# Altium PCB PCB1.PcbDoc (part 6 of 12)
Units mm, origin at the board's own origin, x right, y up, seen from the top; angles counter-clockwise.
Board outline 100 x 100 mm, 6 copper layers (Top Layer, Int1 (GND), Int2 (Sign), Int3 (Sign), Int4 (PWR), Bottom Layer), stack 1.538 mm thick; 614 components, 712 nets, 3014 pads, 1096 vias.
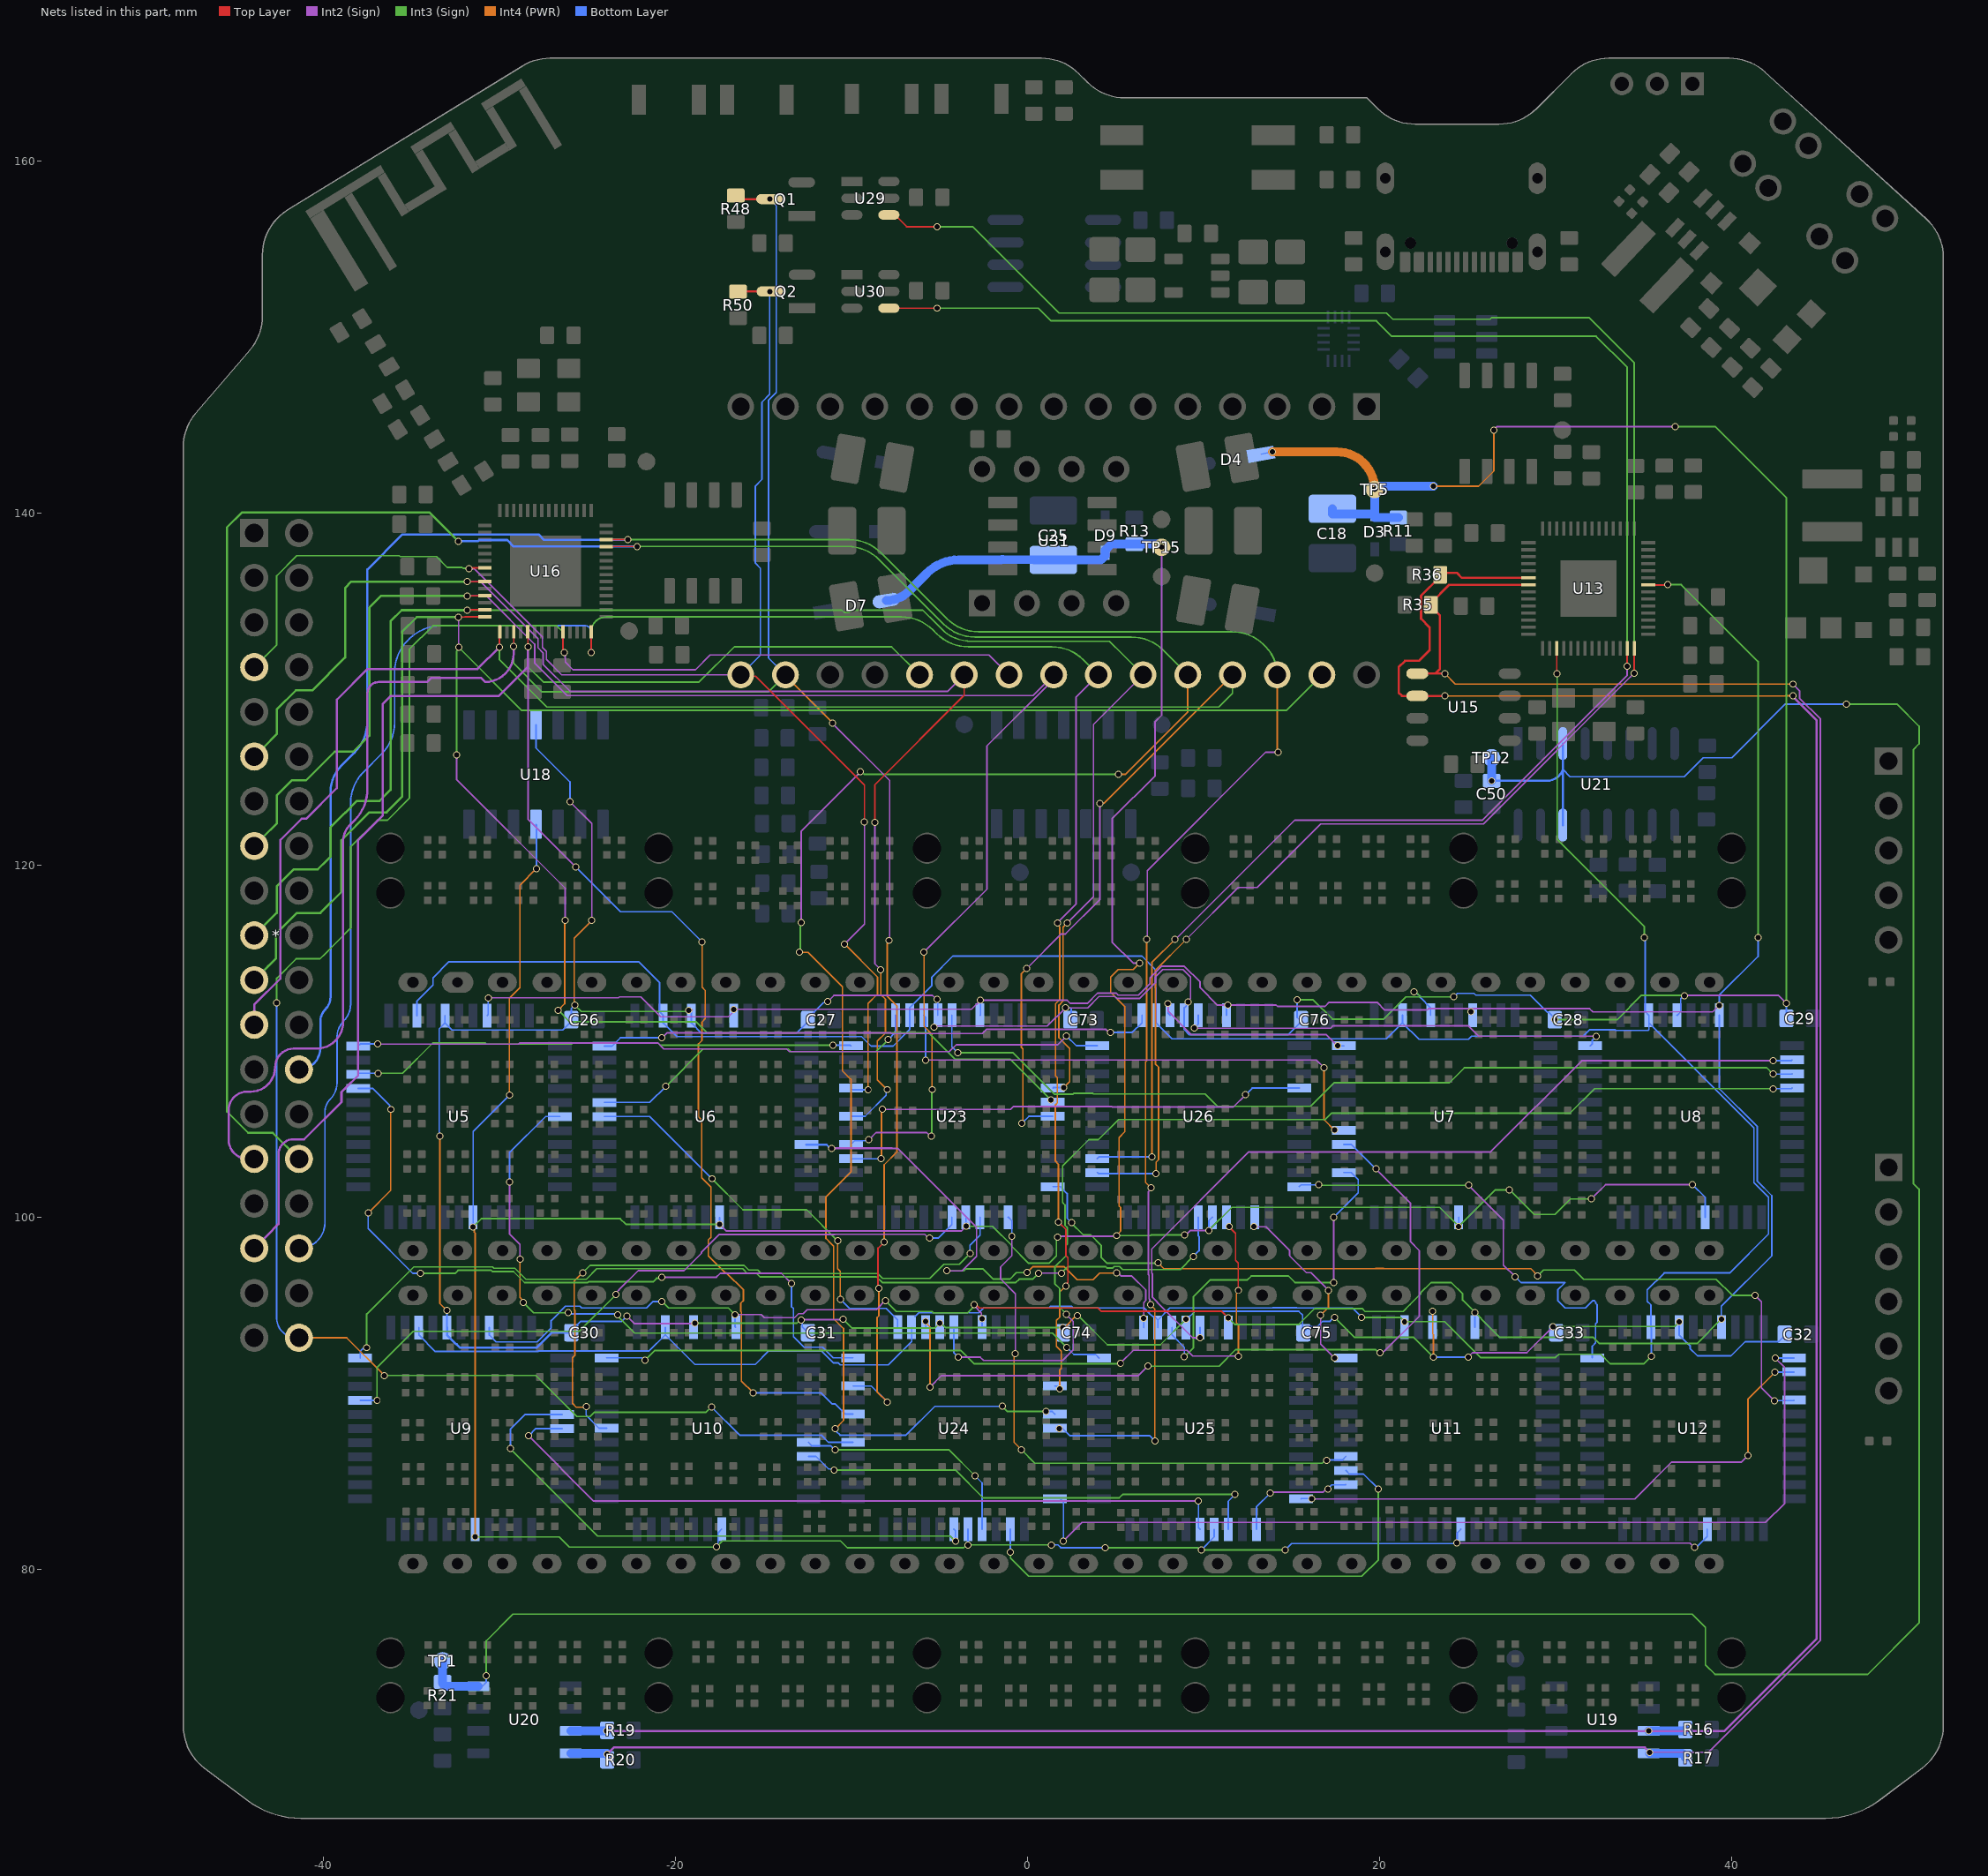
[diagram p9: the nets of this part, all layers, seen from the top]

## Via types
v1: diameter 0.4, hole 0.3, Top Layer to Bottom Layer, tented both sides, 1087 vias
v2: diameter 0.4, hole 0.3, Top Layer to Bottom Layer, 6 vias
v3: diameter 0.4, hole 0.3, Top Layer to Bottom Layer, tented top, 2 vias
v4: diameter 0.6, hole 0.5, Top Layer to Bottom Layer, 1 vias

## Nets (pads, with @x,y where several pads share a name; then routed paths per layer and width w, separated by ;. In a path a pad name is that pad's centre, name@x,y a point inside that pad or via, vN(x,y) a via of type N, cw(c..) or ccw(c..) an arc to the next point about the centre after c; other vN are vias at no path point) (continued)
CH446_DATA: U5.36 U6.36 U7.36 U8.36 U9.36 U10.36 U11.36 U12.36 U13.17 U23.36 U24.36 U25.36 U26.36 | length 211.3
  Top Layer w0.09: U13.17@30.057,132.331 30.057,130.914 v1(30.074,130.897)
  Int3 (Sign) w0.09: v1(18.971,94.32) 21.162,94.32 v1(21.405,94.077) 23.69,94.077 25.724,92.043 29.984,92.043 30.169,92.227 32.55,92.227 33.097,91.68 34.996,91.68 v1(35.432,92.115) ; v1(30.074,130.897) v1(30.074,130.897) 30.075,121.485 35.025,116.535 v1(35.025,115.89)
  Bottom Layer w0.09: U5.36@-34.713,111.468 -34.713,112.279 -33.796,113.196 -33.796,113.612 -32.88,114.529 -22.109,114.529 -20.918,113.337 -20.918,111.673 U6.36@-20.713,111.468 -20.713,111.043 -19.938,110.268 -9.438,110.268 -8.905,109.735 -7.651,109.735 -6.713,110.673 -6.713,111.908 -5.449,113.171 -5.449,113.655 -4.256,114.848 6.488,114.848 7.251,114.086 7.251,113.057 7.287,113.02 7.287,111.058 8.195,110.15 20.379,110.15 U7.36@21.287,111.058 ; U9.36@-34.595,93.743 -34.595,93.318 -33.663,92.385 -27.833,92.385 -27.801,92.418 -23.557,92.418 -23.363,92.418 -21.51,92.418 U10.36@-20.595,93.333 ; U10.36@-20.595,93.758 U10.36@-20.595,93.333 ; U24.36@-6.595,93.758 -6.595,92.948 -7.915,91.628 -10.665,91.628 -10.778,91.741 -11.048,91.741 -11.725,92.418 -14.712,92.418 -15.479,91.651 -18.913,91.651 U10.36@-20.595,93.333 ; U24.36@-6.418,94.36 -6.2,94.578 -2.775,94.578 -2.499,94.854 1.19,94.854 1.278,94.942 2.506,94.942 2.594,94.854 6.609,94.854 6.9,94.563 7.09,94.373 7.185,94.373 U25.36@7.39,94.168 ; U25.36@7.39,93.743 U25.36@7.39,94.168 ; v1(18.971,94.32) 18.437,94.854 15.294,94.854 15.282,94.866 13.913,94.866 13.902,94.854 8.076,94.854 U25.36@7.39,94.168 ; U7.36@21.287,111.483 U7.36@21.287,111.058 ; v1(35.025,115.89) 35.082,115.833 35.082,111.688 U8.36@35.287,111.483 U8.36@35.287,111.058 ; v1(35.432,92.115) 35.432,93.73 U12.36@35.405,93.758 35.405,95.024 35.191,95.238 35.191,95.875 36.161,96.845 39.873,96.845 42.082,99.054 42.082,101.158 41.259,101.981 41.259,105.086 U8.36@35.287,111.058 ; U7.36@21.287,111.058 22.227,110.118 25.039,110.118 25.221,110.3 31.558,110.3 31.924,110.666 33.374,110.666 33.42,110.62 35.234,110.62 35.287,110.673 U8.36@35.287,111.058
CH446_RESET: U5.41 U6.41 U7.41 U8.41 U9.41 U10.41 U11.41 U12.41 U13.36 U23.41 U24.41 U25.41 U26.41 | length 204.8
  Top Layer w0.09: v1(-3.045,95.047) -2.961,95.047 -2.768,94.854 3.988,94.854 4.178,94.663 11.018,94.663 v1(11.39,94.292) ; U13.36@35.26,135.935 36.335,135.935 v1(36.348,135.947)
  Int2 (Sign) w0.09: v1(-30.656,112.478) -30.651,112.474 -23.252,112.474 -23.201,112.525 -21.988,112.525 -20.864,111.401 -17.009,111.401 v1@-16.586,111.824 ; v1(-16.713,111.824) v1@-16.586,111.824 ; v1(-16.637,94.48) -15.132,94.48 -14.957,94.304 -13.251,94.304 -13.022,94.533 -12.759,94.533 -12.533,94.759 -8.605,94.759 v1(-8.091,95.273) ; v1(-3.045,95.047) -3.045,94.973 -2.639,94.566 -2.639,94.274 v1(-2.595,94.231) ; v1(-2.689,112.335) -3.199,111.824 v1@-16.586,111.824 ; v1@-2.682,112.335 2.242,112.335 2.418,112.159 3.382,112.159 3.967,112.744 5.027,112.744 5.137,112.634 6.282,112.634 6.938,113.29 6.938,113.611 7.595,114.268 8.9,114.268 9.791,113.378 9.791,113.057 10.785,112.062 14.113,112.062 14.184,111.991 16.897,111.991 17.129,112.222 19.841,112.222 20.278,111.786 22.695,111.786 22.77,111.861 v1@25.188,111.861 ; v1(25.188,111.679) v1@25.188,111.861 ; v1(39.287,112.051) 38.915,111.679 32.101,111.679 31.919,111.861 v1@25.188,111.861
  Int3 (Sign) w0.09: v1(-20.784,95.226) -20.412,94.854 -17.011,94.854 v1(-16.637,94.48) ; v1(-8.091,95.273) -7.473,94.656 -5.439,94.656 -5.36,94.578 -3.409,94.578 -3.105,94.882 -3.105,94.988 v1(-3.045,95.047) ; v1(11.39,94.292) 11.762,93.92 15.401,93.92 16.302,94.821 18.996,94.821 19.162,94.655 21.323,94.655 21.717,95.05 22.316,95.648 22.316,95.7 22.914,96.298 24.062,96.298 24.704,95.656 24.704,95.298 26.819,93.183 32.125,93.183 32.476,92.833 38.014,92.833 v1(39.405,94.223) ; v1(36.348,135.947) 37.13,135.947 41.49,131.587 v1(41.49,115.893)
  Bottom Layer w0.09: U5.41@-30.713,111.468 -30.656,111.525 v1(-30.656,112.478) ; U9.41@-30.595,93.743 -30.595,93.318 -30.2,92.923 -27.885,92.923 -27.084,93.724 -27.084,94.135 -26.265,94.954 -25.446,94.954 -25.346,94.854 -21.658,94.854 -21.286,95.226 v1(-20.784,95.226) ; v1(-16.637,94.48) -16.637,93.8 U10.41@-16.595,93.758 ; U23.41@-2.713,111.483 -2.689,111.507 v1(-2.689,112.335) ; U24.41@-2.595,93.758 v1(-2.595,94.231) ; U26.41@11.287,111.483 11.287,111.98 v1(11.369,112.062) ; U11.41@25.405,93.758 v1(25.405,94.597) ; U8.41@39.287,111.483 39.287,107.326 41.449,105.164 41.449,102.06 42.272,101.237 42.272,97.824 39.405,94.957 v1(39.405,94.223) ; v1(39.287,112.051) 39.287,112.619 41.49,114.822 v1(41.49,115.893)
CH446_VDD: C18.2 C26.2 C27.2 C28.2 C29.2 C30.2 C31.2 C32.2 C33.2 C73.2 C74.2 C75.2 C76.2 D3.2 D4.1 R11.2 TP5.1 U5.38 U6.38 U7.38 U8.38 U9.38 U10.38 U11.38 U12.38 U18.4 U23.38 U24.38 U25.38 U26.38 | length 294.5
  Top Layer w0.09: v1(-19.265,111.773) -19.052,111.773
  Int2 (Sign) w0.09: v1(-26.011,123.622) -24.772,122.383 v1(-24.772,116.866) ; v1(-22.773,94.385) -22.36,93.972 -18.945,93.972 v1(-18.925,93.993) ; v1(-12.868,94.161) -12.836,94.194 -10.517,94.194 v1(-10.484,94.226) ; v1(-11.37,112.26) -11.014,112.616 -5.413,112.616 -5.192,112.395 v1(-5.16,112.395) ; v1(-5.324,110.816) -5.27,110.87 1.108,110.87 v1(2.144,111.907) 3.399,111.907 4.044,112.552 4.639,112.552 4.641,112.554 4.949,112.554 5.058,112.444 6.36,112.444 7.251,113.334 7.251,113.655 7.674,114.078 8.822,114.078 9.245,113.655 9.245,112.44 9.118,112.313 v1(9.118,112.23) ; v1(25.021,92.068) 25.263,92.311 28.357,92.311 v1(29.85,93.803) ; v1(26.482,144.734) 26.678,144.93 v1(36.78,144.93) ; v1(37.299,112.593) 37.326,112.619 42.645,112.619 v1(43.105,112.159)
  Int3 (Sign) w0.09: v1(-25.738,112.065) -25.372,111.698 -19.424,111.698 -19.349,111.773 v1(-19.265,111.773) ; v1(-18.925,93.993) -13.12,93.993 -12.952,94.161 v1(-12.868,94.161) ; v1(-10.484,94.226) -10.484,94.211 -9.996,93.722 -5.266,93.722 v1(-4.996,93.993) ; v1@-4.989,93.986 -4.905,93.986 -4.658,93.738 v1(2.001,93.738) ; v1(2.826,94.423) 2.84,94.423 2.899,94.482 2.959,94.423 2.959,94.327 4.524,92.762 7.529,92.762 v1(8.99,94.223) ; v1(15.299,112.363) 16.216,112.363 17.309,111.27 20.224,111.27 21.484,112.53 22.265,112.53 ; v1(17.423,94.32) 18.549,93.194 21.916,93.194 v1(23.042,92.068) ; v1(21.944,112.817) 22.028,112.817 22.154,112.691 22.164,112.691 22.265,112.589 22.265,112.53 ; v1(24.21,112.53) 22.265,112.53 ; v1(29.85,93.803) 36.744,93.803 v1(37.005,94.064) ; v1(29.942,111.231) 33.477,111.231 34.865,112.619 37.273,112.619 v1(37.299,112.593) ; v1(36.78,144.93) 39.06,144.93 43.105,140.885 43.105,114.536 43.098,114.529 43.098,114.221 43.105,114.214 v1(43.105,112.159)
  Int4 (PWR) w0.09: v1(-33.402,104.616) -33.402,95.115 v1(-32.995,94.708) ; v1(-25.738,112.065) -25.769,112.096 -25.769,115.869 v1(-24.772,116.866) ; v1(2.001,93.738) 2.072,93.738 2.756,94.423 v1(2.826,94.423) ; v1(23.005,94.678) 23.005,93.392 23.042,93.354 v1(23.042,92.068) ; v1(23.057,141.544) 25.609,141.544 26.482,142.417 v1(26.482,144.734)
  Int4 (PWR) w0.5: v1(13.886,143.497) 17.566,143.497 ; 17.566,143.497 cw(c17.566,141.358) v1(19.705,141.358) ccw(c17.566,141.358) 17.566,143.497
  Bottom Layer w0.09: v1(-33.402,104.616) -33.445,104.659 -33.445,110.711 U5.38@-33.113,111.043 ; U5.38@-33.113,111.468 U5.38@-33.113,111.043 ; U9.38@-32.995,93.743 v1(-32.995,94.708) ; U18.4@-27.945,127.983 -27.945,126.681 -26.011,124.747 v1(-26.011,123.622) ; C30.2@-25.937,93.451 -25.937,93.551 -25.392,94.096 -23.062,94.096 v1(-22.773,94.385) ; v1(-25.738,112.065) -25.937,111.866 -25.937,111.131 -26.42,110.648 -32.718,110.648 U5.38@-33.113,111.043 ; v1(-19.265,111.773) -19.113,111.62 -19.113,111.043 -18.528,110.458 -13.16,110.458 -12.487,111.131 -12.487,111.331 -11.617,112.201 -11.429,112.201 v1(-11.37,112.26) ; v1@-12.797,94.086 -12.809,94.074 -12.809,94.018 -12.808,93.772 C31.2@-12.487,93.451 ; v1(-5.16,112.395) -5.113,112.348 U23.38@-5.113,111.483 ; v1(2.144,111.907) 2.147,111.904 2.415,111.904 2.469,111.849 2.469,111.282 C73.2@2.418,111.231 ; v1(8.99,94.223) 9.045,94.223 9.486,94.664 13.98,94.664 13.992,94.676 15.203,94.676 15.215,94.664 15.401,94.664 15.619,94.446 15.619,93.634 C75.2@15.726,93.527 ; v1(9.118,112.23) 9.118,112.139 8.887,111.908 8.887,110.673 9.18,110.38 14.782,110.38 15.533,111.131 15.299,111.364 v1(15.299,112.363) ; D4.1@13.255,143.358 v1(13.886,143.497) ; C75.2@15.655,93.451 15.655,93.455 C75.2@15.726,93.527 ; v1(17.423,94.32) 17.398,94.32 17.174,94.096 16.753,94.096 16.463,93.806 16.005,93.806 C75.2@15.726,93.527 ; v1(21.944,112.817) 22.028,112.817 22.214,112.63 22.228,112.63 22.297,112.561 22.297,112.498 22.887,111.908 U7.38@22.887,111.483 ; U11.38@23.005,93.758 v1(23.005,94.678) ; v1(23.042,92.068) v1(25.021,92.068) ; v1(24.21,112.53) 24.414,112.734 25.353,112.734 25.454,112.634 28.539,112.634 29.521,111.652 29.592,111.652 29.942,111.302 v1(29.942,111.231) ; U8.38@36.887,111.483 37.092,111.688 37.092,112.438 37.247,112.593 v1(37.299,112.593) ; v1(37.005,94.064) 37.005,93.333 37.629,92.708 37.629,92.558 38.049,92.139 39.952,92.139 40.751,92.938 42.654,92.938 43.005,93.289 C32.2@43.005,93.358 ; C29.2@43.105,111.308 v1(43.105,112.159)
  Bottom Layer w0.127: U9.38@-32.995,93.743 -32.995,93.318 -32.467,92.79 -32.448,92.79 -32.252,92.594 -27.919,92.594 -27.062,93.451 C30.2@-25.937,93.451 ; D3.2@19.705,139.758 D3.2@19.705,139.958
  Bottom Layer w0.5: C18.2@17.305,140.258 17.305,139.958 D3.2@19.705,139.958 v1(19.705,141.358) 19.891,141.544 v1(23.057,141.544) ; D3.2@19.705,139.758 R11.2@21.055,139.758
CH446_VEE: C25.2 D7.2 D9.1 R13.2 TP15.1 U5.16 U6.16 U7.16 U8.16 U9.16 U10.16 U11.16 U12.16 U18.11 U23.16 U24.16 U25.16 U26.16 | length 258.2
  Int2 (Sign) w0.09: v1(-17.513,99.614) -17.124,99.225 -11.039,99.225 -11.035,99.229 -3.766,99.229 v1(-3.498,99.497) ; v1(1.686,98.88) 1.73,98.924 5.013,98.924 v1(5.057,98.967) ; v1(6.36,114.45) 5.991,114.45 4.795,115.646 4.795,122.659 7.233,125.097 7.233,128.162 7.605,128.534 v1(7.605,138.073) ; v1(8.906,99.011) 8.99,99.011 9.24,99.261 v1(10.282,99.261) ; v1(24.367,81.501) 37.631,81.501 v1(37.881,81.251) ; v1(32.012,101.05) 32.823,101.861 v1(37.768,101.861)
  Int3 (Sign) w0.09: v1(-31.513,99.465) -31.047,99.931 -23.156,99.931 -22.84,99.614 v1(-17.513,99.614) ; v1(-31.393,81.848) -26.622,81.848 -26.047,81.274 v1(-17.689,81.274) -17.339,81.624 -10.642,81.624 -10.253,81.235 -3.64,81.235 -3.479,81.395 v1(1.347,81.395) ; v1(-3.498,99.497) -1.998,99.497 -0.915,98.415 -0.915,98.363 0.054,97.394 1.202,97.394 1.625,97.817 1.625,98.735 1.686,98.796 v1(1.686,98.88) ; v1(4.395,81.24) 9.651,81.24 9.786,81.105 v1(9.87,81.105) 9.872,81.103 14.616,81.103 v1(14.619,81.101) ; v1(5.057,98.967) 6.96,98.967 7.003,99.011 v1(8.906,99.011) ; v1(10.282,99.261) 11.59,100.57 17.108,100.57 17.113,100.575 23.398,100.575 v1(24.487,99.486) 26.567,101.566 v1(27.368,101.566) 28.765,100.168 29.948,100.168 30.829,101.05 v1(32.012,101.05)
  Int4 (PWR) w0.09: v1(-31.513,99.465) -31.454,99.406 -31.454,99.164 -31.393,99.103 v1(-31.393,81.848) ; v1(-29.451,106.948) -29.451,112.462 -28.855,113.057 -28.855,118.88 v1(-27.921,119.815) ; v1(5.057,98.967) 5.057,99.005 5.275,99.223 5.275,100.566 5.186,100.655 5.186,104.539 5.516,104.869 5.516,111.986 4.711,112.792 4.711,113.655 5.134,114.078 5.988,114.078 v1(6.36,114.45)
  Bottom Layer w0.09: v1(-31.513,99.465) -31.513,104.886 v1(-29.451,106.948) ; U9.16@-31.395,82.273 -31.395,81.851 v1(-31.393,81.848) ; U18.11@-27.945,122.333 -27.921,122.308 v1(-27.921,119.815) ; v1(-17.689,81.274) -17.689,81.358 -17.6,81.446 -17.6,82.083 U10.16@-17.395,82.288 ; v1(-17.513,99.614) U6.16@-17.513,99.998 ; U23.16@-3.513,100.013 -3.513,99.512 v1(-3.498,99.497) ; v1(-3.395,81.395) U24.16@-3.395,82.288 ; v1(1.347,81.395) 1.716,81.395 1.871,81.24 v1(4.395,81.24) ; v1(9.87,81.105) 9.87,81.128 10.59,81.848 U25.16@10.59,82.273 ; v1(10.282,99.261) 10.282,99.808 U26.16@10.487,100.013 ; v1(14.619,81.101) 14.986,81.468 24.334,81.468 v1(24.367,81.501) ; v1@24.4,81.5 24.4,82.083 U11.16@24.605,82.288 ; v1(24.487,99.486) U7.16@24.487,100.013 ; v1(37.768,101.861) 38.487,101.142 U8.16@38.487,100.013 ; v1(37.881,81.251) 37.94,81.31 38.052,81.31 38.605,81.863 U12.16@38.605,82.288
  Bottom Layer w0.5: D7.2@-8.046,135.048 ccw(c-8.046,136.889) -6.745,135.587 -5.718,136.614 cw(c-3.922,134.818) -3.922,137.358 -1.635,137.358 ccw(c-1.637,137.858) -1.538,137.368 cw(c-1.42,136.803) -1.413,137.38 0.355,137.366 C25.2@1.455,137.358 4.155,137.358 4.405,137.608 4.405,137.908 4.755,138.258 7.42,138.258 v1(7.605,138.073)
CROSS_AI: U5.31 U23.33 | length 28.9
  Int3 (Sign) w0.09: v1(-36.901,108.189) -35.527,108.189 -33.806,109.911 -30.814,109.911 -30.75,109.846 -25.912,109.846 -25.85,109.908 -21.013,109.908 -20.895,109.79 v1(-11.073,109.79)
  Bottom Layer w0.09: U5.31@-38.048,108.133 -37.992,108.189 v1(-36.901,108.189) ; v1(-11.073,109.79) -10.09,109.79 U23.33@-10.048,109.748
CROSS_AJ: U5.30 U24.33 | length 42.6
  Int2 (Sign) w0.09: v1(-20.784,96.602) -17.691,96.602 -17.469,96.824 -14.001,96.824 v1(-13.428,96.252)
  Int3 (Sign) w0.09: v1(-34.517,96.82) -32.547,96.82 -32.371,96.995 -30.485,96.995 -30.415,96.925 -29.219,96.925 -28.592,96.298 -26.738,96.298 -25.003,96.298 -24.96,96.341 -21.293,96.341 -21.091,96.543 -20.844,96.543 v1(-20.784,96.602)
  Int4 (PWR) w0.09: v1(-37.476,100.253) -36.194,101.535 v1(-36.194,106.137)
  Bottom Layer w0.09: U5.30@-38.048,107.333 -37.225,107.333 -36.253,106.361 -36.253,106.196 v1(-36.194,106.137) ; v1(-37.476,100.253) -37.476,99.364 -34.932,96.82 v1(-34.517,96.82) ; v1(-13.428,96.252) -13.428,94.941 -13.318,94.83 -13.318,93.235 -12.712,92.629 -11.668,92.629 -11.062,92.023 U24.33@-9.93,92.023
CROSS_AK: U5.6 U25.33 | length 46.6
  Int2 (Sign) w0.09: v1(-29.447,102.013) -29.447,99.068 -28.853,98.473 v1(-28.853,97.622)
  Int3 (Sign) w0.09: v1(-28.669,95.181) -28.07,94.582 v1(-26.111,94.582) ; v1(-23.293,94.468) -23.293,94.384 -23.145,94.236 -23.145,94.231 -22.344,93.431 1.397,93.431 v1(2.204,92.624)
  Int4 (PWR) w0.09: v1(-28.853,97.622) -28.853,95.448 -28.669,95.264 v1(-28.669,95.181)
  Bottom Layer w0.09: v1(-29.447,102.013) -29.447,103.674 -27.388,105.733 U5.6@-26.578,105.733 ; v1(-26.111,94.582) -26.054,94.525 -23.434,94.525 -23.377,94.468 v1(-23.293,94.468) ; v1(2.204,92.624) 2.615,92.213 3.85,92.213 U25.33@4.055,92.008
CROSS_AL: U5.33 U26.33 | length 42.9
  Int2 (Sign) w0.09: v1(-36.932,109.852) -36.927,109.846 -28.932,109.846 -28.87,109.908 -21.013,109.908 -20.674,109.569 -13.702,109.569 -13.551,109.418 -4.454,109.418 -4.063,109.81 1.702,109.81 v1(2.2,110.308)
  Bottom Layer w0.09: U5.33@-38.048,109.733 -37.929,109.852 v1(-36.932,109.852) ; v1(2.2,110.308) 2.75,109.758 3.942,109.758 U26.33@3.952,109.748
CROSS_BI: U6.29 U23.35 | length 19.3
  Int3 (Sign) w0.09: v1(-20.564,107.446) -18.441,109.569 -13.606,109.569 -13.455,109.418 -8.62,109.418 v1(-7.932,110.107)
  Bottom Layer w0.09: U6.29@-24.048,106.533 -21.477,106.533 v1(-20.564,107.446) ; v1(-7.932,110.107) -7.513,110.525 U23.35@-7.513,111.483
CROSS_BJ: U6.28 U24.35 | length 23.7
  Int3 (Sign) w0.09: v1(-17.948,102.201) -16.181,100.434 -12.569,100.434 v1(-10.802,98.667)
  Int4 (PWR) w0.09: v1(-10.802,98.667) -10.802,97.083 -10.655,96.935 v1(-10.655,95.35)
  Bottom Layer w0.09: U6.28@-24.048,105.733 -21.48,105.733 v1(-17.948,102.201) ; v1(-10.655,95.35) -10.136,94.831 -8.044,94.831 -7.395,94.183 U24.35@-7.395,93.758
CROSS_BK: U6.8 U25.35 | length 30.3
  Int2 (Sign) w0.09: -7.735,103.926 -7.401,103.926 -2.909,99.434 -2.909,97.789 -3.735,96.963 v1(-4.611,96.963) ; v1(5.056,96.842) 5.14,96.842 5.312,96.67 5.91,96.67 6.705,95.875 6.705,95.278 6.59,95.163 v1(6.59,94.261)
  Int2 (Sign) w0.127: v1(-11.152,103.926) -7.735,103.926
  Int3 (Sign) w0.09: v1(-4.611,96.963) -3.624,96.963 -3.505,97.082 -2.557,97.082 -1.967,96.492 -1.018,96.492 -0.646,96.864 v1(-0.044,96.864)
  Int4 (PWR) w0.09: v1(-0.044,96.864) 0.296,97.204 2.063,97.204 2.806,96.461 3.699,96.461 4.08,96.842 v1(5.056,96.842)
  Bottom Layer w0.09: U25.35@6.59,93.743 v1(6.59,94.261)
  Bottom Layer w0.127: U6.8@-12.578,104.133 -11.433,104.133 -11.226,103.926 v1(-11.152,103.926)
CROSS_BL: U6.33 U26.35 | length 31.7
  Int2 (Sign) w0.09: v1(-20.784,110.206) -20.511,110.479 -7.778,110.479 -7.743,110.444 -2.591,110.444 -2.355,110.68 4.444,110.68 4.609,110.514 v1(4.693,110.514)
  Bottom Layer w0.09: U6.33@-24.048,109.733 -23.623,109.733 -23.15,110.206 v1(-20.784,110.206) ; v1(4.693,110.514) 5.944,110.514 6.487,111.058 U26.35@6.487,111.483
CROSS_CI: U7.27 U23.37 | length 29.2
  Int2 (Sign) w0.09: v1(-5.81,108.94) 16.398,108.94 v1(16.828,108.51)
  Int4 (PWR) w0.09: v1(16.828,108.51) 16.828,105.555 17.423,104.96 v1(17.428,104.96)
  Bottom Layer w0.09: U23.37@-5.913,111.483 -5.81,111.38 v1(-5.81,108.94) ; v1(17.428,104.96) U7.27@17.44,104.948
CROSS_CJ: U7.26 U24.37 | length 45.6
  Int2 (Sign) w0.09: v1(-5.552,90.365) -4.903,91.014 6.281,91.014 v1(6.818,91.55) ; v1(19.779,102.756) 21.747,100.788 21.747,98.613 22.243,98.116 22.243,94.39 20.23,92.376 20.071,92.376 v1(20.012,92.317)
  Int3 (Sign) w0.09: v1(6.818,91.55) 10.873,91.55 11.818,92.495 19.75,92.495 19.928,92.317 v1(20.012,92.317)
  Int4 (PWR) w0.09: v1(-5.795,94.094) -5.795,94.01 -5.552,93.767 v1(-5.552,90.365)
  Bottom Layer w0.09: U24.37@-5.795,93.758 v1(-5.795,94.094) ; U7.26@17.952,104.148 18.377,104.148 19.769,102.756 v1(19.779,102.756)
CROSS_CK: U7.24 U25.37 | length 21.6
  Int2 (Sign) w0.09: v1(17.373,96.298) 17.379,96.305 17.379,100.006 v1(17.386,100.013)
  Int3 (Sign) w0.09: v1(8.894,92.082) 9.418,92.606 9.418,95.502 10.368,96.453 12.477,96.453 12.697,96.673 14.805,96.673 15.181,96.298 v1(17.373,96.298)
  Bottom Layer w0.09: U25.37@8.19,93.743 8.19,93.318 8.894,92.614 v1(8.894,92.082) ; v1(17.386,100.013) 18.772,101.399 18.772,102.153 18.377,102.548 U7.24@17.952,102.548
CROSS_CL: U7.33 U26.37 | length 12
  Int2 (Sign) w0.09: v1(7.964,112.153) 7.964,111.721 9.305,110.38 16.967,110.38 v1(17.599,109.748)
  Bottom Layer w0.09: v1(7.964,112.153) 7.964,111.606 U26.37@8.087,111.483 ; v1(17.599,109.748) U7.33@17.952,109.748
CROSS_DI: U8.3 U23.39 | length 52
  Int3 (Sign) w0.09: v1(-3.984,109.363) -0.845,109.363 1.508,107.009 2.579,107.009 2.617,107.047 3.688,107.047 3.726,107.009 4.796,107.009 4.8,107.013 10.083,107.013 10.779,106.317 16.062,106.317 17.396,107.651 23.948,107.651 24.805,108.507 41.982,108.507 v1(42.344,108.146)
  Bottom Layer w0.09: U23.39@-4.313,111.483 -4.313,109.692 v1(-3.984,109.363) ; v1(42.344,108.146) 43.42,108.146 U8.3@43.422,108.148
CROSS_DJ: U8.4 U24.39 | length 63.2
  Int2 (Sign) w0.09: v1(-3.951,92.06) -2.701,92.06 -2.519,91.878 1.985,91.878 2.576,92.47 2.576,94.092 v1(2.187,94.482)
  Int3 (Sign) w0.09: v1(2.187,94.482) 2.187,94.522 1.815,94.894 1.815,95.954 1.537,96.231 1.537,97.192 2.171,97.825 2.171,98.415 2.248,98.492 2.248,99.419 2.109,99.558 2.109,100.71 1.974,100.845 1.974,102.925 3.468,104.419 4.013,104.419 5.151,105.557 16.89,105.557 17.26,105.927 30.819,105.927 32.202,107.31 v1(42.338,107.31)
  Bottom Layer w0.09: U24.39@-4.195,93.758 -4.195,92.305 v1(-3.951,92.06) ; v1(42.338,107.31) 43.384,107.31 U8.4@43.422,107.348
CROSS_DK: U8.2 U25.39 | length 47.8
  Int2 (Sign) w0.09: v1(9.79,93.167) 9.36,93.167 7.36,95.168 7.36,95.189 7.085,95.464 7.085,96.801 7.04,96.846 7.04,98.204 12.558,103.722 26.29,103.722 31.471,108.904 v1(42.358,108.904)
  Bottom Layer w0.09: v1(9.79,93.167) U25.39@9.79,93.743 ; v1(42.358,108.904) 43.378,108.904 U8.2@43.422,108.948
CROSS_DL: U8.33 U26.39 | length 24.7
  Int2 (Sign) w0.09: v1(9.459,110.752) 17.205,110.752 17.346,110.894 25.007,110.894 25.607,110.294 v1(32.292,110.294)
  Bottom Layer w0.09: v1(9.459,110.752) 9.687,110.98 U26.39@9.687,111.483 ; U8.33@31.952,109.748 32.078,109.874 32.078,110.08 v1(32.292,110.294)
CROSS_EI: U9.30 U23.17 | length 39.5
  Int2 (Sign) w0.09: v1(-23.403,95.615) -23.403,95.699 -23.229,95.873 -23.229,95.875 -22.13,96.974 -19.538,96.974 -18.534,97.979 -18.534,98.031 -17.529,99.035 -10.961,99.035 -10.956,99.039 -5.856,99.039 -5.649,98.832 v1(-5.589,98.832)
  Int3 (Sign) w0.09: v1(-36.975,89.608) -36.975,91.472 -34.922,93.525 -25.493,93.525 v1(-23.403,95.615)
  Bottom Layer w0.09: U9.30@-37.93,89.608 v1(-36.975,89.608) ; v1(-5.589,98.832) -5.068,98.832 -4.313,99.588 U23.17@-4.313,100.013
CROSS_EJ: U9.5 U24.17 | length 32.6
  Int3 (Sign) w0.09: v1(-29.398,86.867) -24.433,81.902 -4.405,81.902 v1(-4.11,81.607)
  Bottom Layer w0.09: v1(-29.398,86.867) -29.398,87.961 -28.55,88.808 U9.5@-26.46,88.808 ; U24.17@-4.195,82.288 -4.11,82.202 v1(-4.11,81.607)
CROSS_EK: U9.6 U25.17 | length 43.3
  Int2 (Sign) w0.09: v1(-28.363,87.59) -24.66,83.888 v1@9.662,83.888
  Bottom Layer w0.09: v1(-28.363,87.59) -27.945,88.008 U9.6@-26.46,88.008 ; v1(9.696,83.899) 9.696,82.367 U25.17@9.79,82.273
CROSS_EL: U9.33 U26.17 | length 54.9
  Int2 (Sign) w0.09: v1(0.623,96.832) v1(1.909,96.832)
  Int3 (Sign) w0.09: v1(-37.558,92.601) -37.558,94.515 -34.881,97.192 -30.413,97.192 -30.336,97.115 -29.141,97.115 -28.514,96.488 -26.66,96.488 -25.082,96.488 -24.484,97.085 -16.196,97.085 -15.936,96.824 -15.423,96.824 -15.223,96.624 -8.598,96.624 -8.326,96.351 -8.308,96.351 -8.26,96.302 -0.675,96.302 -0.485,96.492 0.283,96.492 v1(0.623,96.832) ; v1(1.909,96.832) 2.282,97.205 4.421,97.205 4.505,97.121 4.809,97.121 4.902,97.214 5.21,97.214 5.303,97.121 5.386,97.038 8.661,97.038 v1(9.405,97.782)
  Bottom Layer w0.09: U9.33@-37.93,92.008 -37.93,92.393 -37.782,92.542 -37.618,92.542 v1(-37.558,92.601) ; v1(9.405,97.782) 9.732,98.109 9.732,98.898 9.687,98.943 U26.17@9.687,100.013
CROSS_FI: U10.28 U23.15 | length 35.9
  Int3 (Sign) w0.09: v1(-25.287,96.86) -24.872,97.275 -16.117,97.275 -15.857,97.014 -15.344,97.014 -15.144,96.814 -8.52,96.814 -8.247,96.541 -8.23,96.541 -8.228,96.539 -5.562,96.539 -4.765,97.335 -3.889,97.335 v1(-3.281,97.943)
  Int4 (PWR) w0.09: v1(-25.287,96.86) -25.769,96.378 -25.769,94.766 -25.739,94.736 -25.739,92.152 -25.875,92.016 -25.875,89.432 -25.657,89.214 -25.134,89.214 v1(-25.093,89.255)
  Bottom Layer w0.09: v1(-25.093,89.255) -25.093,88.761 -24.355,88.023 U10.28@-23.93,88.023 ; v1(-3.281,97.943) -3.281,98.421 -2.713,98.989 U23.15@-2.713,100.013
CROSS_FJ: U10.7 U24.15 | length 13.4
  Int3 (Sign) w0.09: v1(-10.932,86.795) -4.473,86.795 v1(-2.998,85.32)
  Bottom Layer w0.09: U10.7@-12.46,87.223 -12.255,87.018 -11.183,87.018 -10.96,86.795 v1(-10.932,86.795) ; v1(-2.998,85.32) -2.595,84.918 U24.15@-2.595,82.288
CROSS_FK: U10.8 U25.15 | length 27.5
  Int3 (Sign) w0.09: v1(-11.007,85.649) -4.121,85.649 -2.536,84.064 5.195,84.064 5.402,84.271 11.77,84.271 v1(11.776,84.265)
  Bottom Layer w0.09: U10.8@-12.46,86.423 -12.035,86.423 -11.321,85.708 -11.066,85.708 v1(-11.007,85.649) ; U25.15@11.39,82.273 11.39,83.879 v1(11.776,84.265)
CROSS_FL: U10.33 U26.15 | length 44.6
  Top Layer w0.09: v1(11.436,99.471) 11.805,99.102 11.805,97.557 11.959,97.404 v1(11.959,95.859)
  Int2 (Sign) w0.09: v1(5.262,91.716) 6.001,92.454 9.048,92.454 9.379,92.123 v1(11.972,92.123)
  Int3 (Sign) w0.09: v1(-21.736,91.898) -21.201,92.432 -3.797,92.432 -3.053,91.688 5.235,91.688 v1(5.262,91.716)
  Int4 (PWR) w0.09: v1(11.959,95.859) 11.959,95.775 11.856,95.673 11.856,93.997 11.972,93.882 v1(11.972,92.123)
  Bottom Layer w0.09: U10.33@-23.93,92.023 -21.945,92.023 -21.82,91.898 v1(-21.736,91.898)
CROSS_GI: U11.26 U23.13 | length 33
  Int2 (Sign) w0.09: v1(-0.905,98.931) -0.905,97.827 -1.545,97.188 -1.545,96.504 -0.708,95.668 v1(-0.708,92.25)
  Int3 (Sign) w0.09: v1(-0.367,86.808) 0.405,86.036 16.728,86.036 16.898,86.206 v1(16.982,86.206)
  Int4 (PWR) w0.09: v1(-0.708,92.25) -0.708,92.167 -0.782,92.093 -0.782,87.223 v1(-0.367,86.808)
  Bottom Layer w0.09: U23.13@-1.113,100.013 -0.908,99.808 -0.908,98.934 v1(-0.905,98.931) ; v1(16.982,86.206) 16.994,86.218 17.865,86.218 U11.26@18.07,86.423
CROSS_GJ: U11.25 U24.13 | length 29.7
  Int3 (Sign) w0.09: v1(-0.995,80.982) -0.98,80.967 -0.98,80.647 0.054,79.614 18.982,79.614 19.918,80.55 v1(19.918,84.576)
  Bottom Layer w0.09: v1(-0.995,80.982) U24.13@-0.995,82.288 ; U11.25@18.07,85.623 18.275,85.418 19.076,85.418 v1(19.918,84.576)
CROSS_GK: U11.24 U25.13 | length 6.9
  Int2 (Sign) w0.09: v1(13.779,84.341) 13.834,84.396 16.791,84.396 16.971,84.576 v1(17.055,84.576)
  Bottom Layer w0.09: U25.13@12.99,82.273 12.99,83.551 v1(13.779,84.341) ; v1(17.055,84.576) 17.055,84.603 17.26,84.808 18.055,84.808 U11.24@18.07,84.823
CROSS_GL: U11.33 U26.13 | length 10.3
  Int2 (Sign) w0.09: v1(12.853,99.471) 13.537,99.471 14.871,98.138 14.871,97.862 14.885,97.848 14.885,97.803 15.828,96.86 16.081,96.86 v1(17.083,95.858) ; v1(16.637,94.449) 16.637,92.809 v1(17.423,92.023)
  Int4 (PWR) w0.09: v1(16.637,94.449) 17.083,94.895 v1(17.083,95.858)
CROSS_HI: U12.4 U23.11 | length 51.6
  Int2 (Sign) w0.09: v1(41.315,95.576) 41.687,95.204 41.687,90.321 v1(42.419,89.59)
  Int3 (Sign) w0.09: v1(2.481,99.712) 2.481,99.676 3.153,99.004 3.576,99.004 4.165,98.415 4.165,97.73 4.491,97.404 5.289,97.404 5.299,97.394 7.38,97.394 v1(7.412,97.425) ; v1(28.958,96.67) 29.299,97.011 31.055,97.011 31.578,96.488 39.112,96.488 40.024,95.576 v1(41.315,95.576)
  Int4 (PWR) w0.09: v1(7.412,97.425) 7.412,97.41 7.73,97.092 19.743,97.092 19.751,97.099 20.216,97.099 20.223,97.092 28.586,97.092 28.958,96.72 v1(28.958,96.67)
  Bottom Layer w0.09: U23.11@1.422,101.748 1.847,101.748 2.237,101.358 2.237,99.956 v1(2.481,99.712) ; v1(42.419,89.59) 43.507,89.59 U12.4@43.54,89.623
CROSS_HJ: U12.1 U24.11 | length 54.2
  Int2 (Sign) w0.09: v1(2.025,81.612) 3.082,82.669 41.915,82.669 43.002,83.756 43.002,91.481 v1(42.475,92.008)
  Bottom Layer w0.09: U24.11@1.54,84.023 1.82,84.023 2.025,83.818 v1(2.025,81.612) ; v1(42.475,92.008) 43.525,92.008 U12.1@43.54,92.023
CROSS_HK: U12.2 U25.11 | length 32.9
  Int2 (Sign) w0.09: v1(16.14,84.024) 16.156,84.008 34.493,84.008 36.584,86.098 40.553,86.098 v1(40.916,86.462)
  Int4 (PWR) w0.09: v1(40.916,86.462) 40.916,89.666 v1(42.46,91.209)
  Bottom Layer w0.09: U25.11@15.525,84.008 15.541,84.024 v1(16.14,84.024) ; v1(42.46,91.209) 43.526,91.209 U12.2@43.54,91.223
CROSS_HL: U12.33 U26.11 | length 26
  Int2 (Sign) w0.09: v1(25.04,101.834) 27.025,99.85 27.025,97.297 v1(27.687,96.634)
  Int3 (Sign) w0.09: v1(16.527,101.851) 16.555,101.824 25.03,101.824 v1(25.04,101.834)
  Bottom Layer w0.09: U26.11@15.422,101.748 15.526,101.851 v1(16.527,101.851) ; v1(27.687,96.634) 28.024,96.298 28.109,96.298 30.534,96.298 30.111,95.875 30.111,95.277 30.534,94.854 31.682,94.854 32.105,95.277 32.179,95.277 32.271,95.185 32.271,95.119 32.34,95.05 32.34,94.034 32.258,93.952 32.258,92.871 32.07,92.683 U12.33@32.07,92.023
CROSS_Rx: U13.27 U26.25 U30.4 | length 109.8
  Top Layer w0.09: U30.4@-7.894,151.658 v1(-5.151,151.658) ; v1(34.057,131.312) U13.27@34.057,132.331
  Int2 (Sign) w0.09: v1(8.36,115.8) 8.401,115.8 15.176,122.575 25.839,122.575 34.057,130.792 v1(34.057,131.312)
  Int3 (Sign) w0.09: v1(-5.151,151.658) 0.599,151.658 1.32,150.937 19.807,150.937 20.683,150.062 32.292,150.062 34.057,148.297 v1(34.057,131.312)
  Int4 (PWR) w0.09: v1(7.064,103.445) 7.061,103.448 7.061,114.5 v1(8.36,115.8)
  Bottom Layer w0.09: U26.25@3.952,103.348 4.049,103.445 v1(7.064,103.445)
CROSS_Tx: U13.28 U26.24 U29.4 | length 114.2
  Top Layer w0.09: U29.4@-7.895,156.958 -7.557,156.958 -6.884,156.285 v1(-5.16,156.285) ; v1(34.457,130.923) U13.28@34.457,132.331
  Int2 (Sign) w0.09: v1(9.009,115.8) 11.959,118.75 13.028,118.75 16.636,122.358 25.891,122.358 34.247,130.713 v1(34.457,130.923)
  Int3 (Sign) w0.09: v1(-5.16,156.285) -3.133,156.285 1.768,151.384 20.385,151.384 20.738,151.031 26.26,151.031 26.354,151.124 31.876,151.124 34.457,148.543 v1(34.457,130.923)
  Int4 (PWR) w0.09: v1(7.287,102.495) 7.287,103.142 7.436,103.291 7.436,108.532 7.251,108.717 7.251,114.042 v1(9.009,115.8)
  Bottom Layer w0.09: U26.24@3.952,102.548 4.005,102.495 v1(7.287,102.495)
CURR_SENSE_DAC_+_9: C50.2 R21.2 TP1.1 TP12.1 U20.8 U21.3 U21.14 | length 176.3
  Int3 (Sign) w0.09: v1(-30.773,73.966) -30.773,75.937 -29.25,77.46 37.755,77.46 38.505,76.71 38.505,74.58 39.045,74.04 47.715,74.04 50.64,76.965 50.64,101.607 50.313,101.934 50.313,126.576 50.64,126.903 50.64,127.905 49.38,129.165 v1(46.5,129.165)
  Bottom Layer w0.09: U20.8@-31.22,73.363 -30.995,73.363 -30.765,73.592 -30.773,73.592 v1(-30.773,73.966) ; 30.4,125.455 30.815,125.04 37.29,125.04 38.37,126.12 39.998,126.12 43.043,129.165 v1(46.5,129.165)
  Bottom Layer w0.127: v1(26.355,124.808) 29.508,124.808 ccw(c29.508,125.745) 30.4,125.455 ; U21.14@30.4,122.292 30.4,125.455 ; U21.3@30.4,126.924 30.4,125.455
  Bottom Layer w0.5: TP1.1@-33.245,74.808 R21.2@-33.245,73.608 ccw(c-33,73.608) -33,73.363 U20.8@-31.22,73.363 ; v1(26.355,124.808) TP12.1@26.355,126.108
CURR_SENSE_DAC_-: U23.25 U26.4 | length 28.8
  Int2 (Sign) w0.09: v1(-8.272,106.142) -0.985,106.142 -0.834,106.293 4.776,106.293 4.8,106.269 11.667,106.269 v1(12.371,106.973)
  Int4 (PWR) w0.09: v1(-8.347,103.332) -8.31,103.369 -8.31,106.104 v1(-8.272,106.142)
  Bottom Layer w0.09: U23.25@-10.048,103.348 -10.032,103.332 v1(-8.347,103.332) ; v1(12.371,106.973) 12.746,107.348 U26.4@15.422,107.348
CURRENT_SCL: R17.1 R20.1 R35.1 U13.7 U15.5 U19.4 U20.4 | length 163.1
  Top Layer w0.127: U15.5@22.133,130.897 23.137,130.897 ; v1(23.698,130.897) 23.137,130.897 ; U13.7@28.453,135.935 23.935,135.935 22.908,134.908 22.908,134.708 23.413,134.202 23.413,131.173 23.137,130.897
  Int2 (Sign) w0.09: v1(35.34,69.614) 38.67,69.614 45.036,75.979 45.036,128.315 43.849,129.503 43.849,129.929 v1(43.477,130.301)
  Int2 (Sign) w0.127: v1(-23.895,69.508) -23.518,69.886 35.06,69.886 35.332,69.614 v1(35.34,69.614)
  Int4 (PWR) w0.09: v1(23.698,130.897) 24.294,130.301 v1(43.477,130.301)
  Bottom Layer w0.127: U19.4@35.28,69.553 ccw(c35.28,69.614) v1(35.34,69.614)
  Bottom Layer w0.5: U20.4@-25.97,69.553 -23.94,69.553 cw(c-23.94,69.508) v1(-23.895,69.508) ; U19.4@35.34,69.553 37.192,69.553 37.355,69.39 R17.1@37.355,69.29
CURRENT_SDA: R16.1 R19.1 R36.1 U13.6 U15.6 U19.3 U20.3 | length 165.5
  Top Layer w0.127: v1(23.698,129.627) U15.6@22.133,129.627 21.258,129.627 21.075,129.81 21.075,131.265 21.435,131.625 22.23,131.625 22.83,132.225 22.83,133.528 22.344,134.014 22.344,135.322 23.435,136.412 R36.1@23.435,136.513 23.529,136.607 24.392,136.607 24.664,136.335 U13.6@28.453,136.335
  Int2 (Sign) w0.127: v1(-23.93,70.823) v1(35.28,70.823) 39.585,70.823 44.828,76.066 44.828,128.229 43.477,129.58 v1(43.477,129.63)
  Int4 (PWR) w0.09: v1(23.698,129.627) 23.7,129.628 43.048,129.628 43.05,129.63 v1(43.477,129.63)
  Bottom Layer w0.5: U20.3@-25.97,70.823 v1(-23.93,70.823) ; v1(35.28,70.823) 37.27,70.823 ccw(c37.27,70.908) R16.1@37.355,70.908 ; v1(-23.93,70.823) ccw(c-23.93,70.858) R19.1@-23.895,70.858 cw(c-23.93,70.858) v1(-23.93,70.823)
D0: *.29 Q1.3 R48.2 U16.17 U24.31 U31.17 | length 137.6
  Top Layer w0.09: v1(-29.211,132.436) -29.208,132.439 -29.208,133.262 U16.17@-29.204,133.265 ; v1(-8.463,95.979) -8.514,96.031 -8.514,98.249 v1(-8.163,98.6)
  Top Layer w0.127: R48.2@-16.594,158.058 -16.394,157.858 v1(-14.666,157.858)
  Int2 (Sign) w0.09: v1(-11.102,128.08) -7.846,124.823 -7.846,115.769 v1(-7.878,115.737)
  Int2 (Sign) w0.127: *.29@-43.949,103.323 -44.313,103.323 cw(c-44.313,104.415) -45.405,104.415 -45.405,106.095 cw(c-44.355,106.095) -44.355,107.145 -44.157,107.145 ccw(c-44.157,108.537) -42.765,108.537 cw(c-41.715,108.537) -41.715,109.587 -40.428,109.587 ccw(c-40.428,111.12) -38.895,111.12 -38.895,121.405 cw(c-37.667,121.405) -38.535,122.273 -38.26,122.548 ccw(c-40.057,124.344) -37.517,124.344 -37.517,129.785 cw(c-36.882,129.785) -36.882,130.42 -34.124,130.42 -33.889,130.654 -31.062,130.654 -30.828,130.42 ccw(c-30.828,132.032) -29.215,132.032 -29.215,132.431 v1(-29.211,132.436)
  Int3 (Sign) w0.09: v1(-29.211,132.436) -29.211,131.479 -27.59,129.858 -14.738,129.858 U31.17@-13.769,130.827
  Int4 (PWR) w0.09: U31.17@-13.769,130.827 -13.769,130.787 -11.102,128.12 v1(-11.102,128.08) ; v1(-8.463,95.979) -8.463,94.414 -8.567,94.309 -8.567,90.103 v1(-7.976,89.512) ; v1(-8.163,98.6) -8.163,102.989 -7.428,103.725 -7.428,112.01 -7.989,112.571 -7.989,115.542 -7.878,115.653 v1(-7.878,115.737)
  Bottom Layer w0.09: v1(-14.666,157.858) -14.292,157.484 -14.292,146.865 -14.733,146.424 -14.733,131.79 U31.17@-13.769,130.827 ; U24.31@-9.93,90.423 -8.887,90.423 v1(-7.976,89.512)
D1: *.7 Q2.3 R50.2 U16.7 U23.30 U31.16 | length 90.8
  Top Layer w0.09: v1(-31.757,136.861) -31.718,136.9 -30.875,136.9 U16.7@-30.857,136.918 ; U31.16@-16.309,130.827 -16.234,130.752 -15.465,130.752 -9.279,124.566 v1(-9.279,122.472) ; v1(-14.664,152.608) Q2.3@-14.645,152.608
  Top Layer w0.127: R50.2@-16.462,152.594 -16.449,152.608 v1(-14.664,152.608)
  Int2 (Sign) w0.09: v1(-31.757,136.861) -31.741,136.845 -31.443,136.845 -27.577,132.98 -27.577,132.385 -27.352,132.16 -27.352,131.695 -26.484,130.827 U31.16@-16.309,130.827 ; v1(-10.407,115.527) -9.279,116.655 v1(-9.279,122.472)
  Int3 (Sign) w0.09: *.7@-43.949,131.263 -43.324,131.888 -42.675,132.537 -42.675,133.455 -42.675,136.025 -42.673,136.027 -42.673,136.111 -42.673,136.454 -41.532,137.595 -35.708,137.595 -35.66,137.548 -34.318,137.548 -33.6,137.548 -32.979,136.927 -32.137,136.927 -32.092,136.882 -31.777,136.882 v1(-31.757,136.861)
  Int4 (PWR) w0.09: v1(-10.407,115.527) -8.535,113.655 -8.535,112.691 -9.076,112.151 v1(-9.076,107.245)
  Bottom Layer w0.09: U31.16@-16.309,130.827 -15.193,131.943 -15.193,136.881 -15.477,137.165 -15.477,141.557 -15.105,141.929 -15.105,146.321 -14.664,146.761 v1(-14.664,152.608) ; U23.30@-10.048,107.348 -9.945,107.245 v1(-9.076,107.245)
D2: *.33 U16.19 U24.29 U31.20 | length 126.9
  Top Layer w0.09: U16.19@-28.404,133.265 -28.399,133.26 -28.399,132.42 v1(-28.393,132.414)
  Int2 (Sign) w0.09: v1(-28.393,132.414) -28.393,122.622 v1(-25.679,119.907)
  Int2 (Sign) w0.127: *.33@-43.949,98.243 -43.201,98.991 -42.57,99.622 -42.57,100.515 -42.57,103.587 cw(c-41.715,103.587) -41.715,104.442 -41.113,104.442 -38.994,106.561 -38.994,107.121 -38.792,107.323 -38.048,108.067 -38.048,109.119 -38.048,121.258 -38.048,121.439 -37.92,121.566 -37.395,122.092 -36.659,122.828 -36.659,123.687 -36.659,129.168 -36.659,129.168 -36.206,129.622 -30.933,129.622 -30.06,129.622 -28.393,131.289 -28.393,132.4 v1@-28.405,132.413
  Int3 (Sign) w0.09: v1(-28.393,132.414) -28.393,131.292 -27.521,130.42 -18.677,130.42 -16.676,132.42 -7.743,132.42 U31.20@-6.149,130.827
  Int4 (PWR) w0.09: v1(-18.508,115.66) -18.505,115.657 -18.505,113.076 -18.322,112.893 -18.322,111.295 -18.513,111.103 -18.513,110.054 -18.708,109.858 -18.708,105.707 -18.528,105.527 -18.528,102.255 -18.004,101.731 -18.004,98.874 -18.149,98.728 -18.149,97.817 -17.178,96.846 -17.126,96.846 -16.155,95.875 -16.155,95.277 -16.31,95.122 -16.31,94.656 -16.265,94.612 -16.265,90.706 v1(-15.6,90.041)
  Bottom Layer w0.09: v1(-25.679,119.907) -23.135,117.364 -20.219,117.364 -18.515,115.66 v1(-18.508,115.66) ; v1(-15.6,90.041) -15.587,90.028 -11.735,90.028 -11.11,89.403 -10.935,89.403 -10.355,88.823 U24.29@-9.93,88.823
D3: *.11 U16.9 U23.28 U31.21 | length 81.4
  Top Layer w0.09: v1(-31.846,136.117) U16.9@-30.857,136.118 ; v1(-8.687,122.453) -8.687,124.588 -3.609,129.666 U31.21@-3.609,130.827
  Int2 (Sign) w0.09: v1(-31.846,136.117) -31.843,136.12 -31.077,136.12 -27.831,132.874 -27.831,132.37 -27.542,132.081 -27.542,131.424 -26.011,129.893 -4.543,129.893 U31.21@-3.609,130.827 ; v1(-8.687,122.453) -8.687,114.404 v1(-8.361,114.078)
  Int3 (Sign) w0.127: *.11@-43.949,126.183 -43.419,126.713 -42.675,127.457 -42.675,128.858 -41.588,129.945 -41.453,129.945 -40.749,129.945 -40.653,129.945 -38.79,131.808 -38.79,131.904 -38.79,135.764 -38.434,136.12 -31.848,136.12 v1(-31.846,136.117)
  Int4 (PWR) w0.09: v1(-8.361,114.078) -8.345,114.062 -8.345,112.658 -8.085,112.398 -8.085,110.48 -8.548,110.016 -8.548,107.823 v1(-7.99,107.265)
  Bottom Layer w0.09: U23.28@-10.048,105.748 -9.238,105.748 -8.049,106.936 -8.049,107.206 v1(-7.99,107.265)
D4: *.38 U16.24 U24.27 U31.22 | length 119
  Top Layer w0.09: U16.24@-26.404,133.265 -26.404,132.465 ccw(c-26.314,132.465) -26.404,132.463 -26.395,132.085 v1(-26.345,132.085)
  Int2 (Sign) w0.09: v1(-26.345,132.085) -26.285,132.026 -26.285,131.796 -26.268,131.779 -26.268,131.547 -25.838,131.117 -18.883,131.117 -18.04,131.96 -2.202,131.96 U31.22@-1.069,130.827
  Int3 (Sign) w0.09: v1(-42.675,112.187) -42.675,113.592 -41.572,114.695 -41.439,114.695 -40.626,114.695 -40.209,114.695 -39.914,114.99 -39.217,115.687 -38.473,116.431 -38.473,117.483 -38.473,121.054 -36.957,122.57 -36.866,122.57 -36.374,122.57 -35.14,123.804 -35.14,132.276 -33.799,133.616 -26.767,133.616 -26.403,133.252 -26.403,132.465 -26.403,132.463 -26.395,132.085 v1(-26.345,132.085) ; v1(-36.555,91.02) -27.951,91.02 -25.624,88.693 -25.326,88.693 -24.86,88.693 -24.622,88.931 -18.271,88.931 v1(-17.973,89.229)
  Int4 (PWR) w0.09: *.38@-41.409,93.163 -38.698,93.163 v1(-36.555,91.02)
  Bottom Layer w0.09: v1(-42.675,112.187) -42.675,94.29 ; *.38@-41.409,93.163 *.38@-41.548,93.163 ; v1(-17.973,89.229) -16.372,87.628 -11.735,87.628 -11.33,87.223 U24.27@-9.93,87.223 ; -42.675,94.29 ccw(c-41.548,94.29) *.38@-41.548,93.163 ; -42.675,94.29 ccw(c-41.548,94.29) *.38@-41.548,93.163
D5: *.15 U16.11 U23.26 U31.23 | length 95.3
  Top Layer w0.09: v1(-31.846,135.31) -31.839,135.318 U16.11@-30.857,135.318
  Int2 (Sign) w0.09: v1(-31.846,135.31) -30.763,135.31 -28.021,132.568 -28.021,131.503 -26.168,129.65 0.294,129.65 U31.23@1.471,130.827 1.471,130.572 -2.32,126.782 -2.32,118.655 v1(-5.895,115.081) v1(-5.895,115.081) ; v1(-9.03,104.412) -8.623,104.82 -5.749,104.82 -5.552,104.623 v1(-5.471,104.623)
  Int3 (Sign) w0.09: v1(-5.471,104.623) -5.455,104.64 -5.455,107.248 v1(-5.438,107.265)
  Int3 (Sign) w0.127: *.15@-43.949,121.103 -43.419,121.633 -42.675,122.377 -42.675,123.975 -41.82,124.83 -41.01,124.83 -39.375,126.465 -38.325,126.465 -37.41,127.38 -37.41,134.657 -36.757,135.31 v1(-31.846,135.31)
  Int4 (PWR) w0.09: v1(-5.895,115.081) -5.895,110.861 -5.438,110.403 v1(-5.438,107.265)
  Bottom Layer w0.09: U23.26@-10.048,104.148 -9.843,104.353 -9.174,104.353 -9.114,104.412 v1(-9.03,104.412)
D6: *.34 U16.28 U24.3 U31.24 | length 142.5
  Top Layer w0.09: v1(-24.804,132.082) U16.28@-24.804,133.265 ; v1(1.737,99.739) 2.171,99.306 2.171,97.817 2.281,97.707 2.281,96.302 2.158,96.18 v1(2.158,96.096)
  Int2 (Sign) w0.09: v1(1.68,116.738) 2.738,117.795 2.738,129.554 U31.24@4.011,130.827
  Int3 (Sign) w0.09: v1(-24.804,132.082) -24.804,133.265 ; 1.365,132.42 cw(c1.365,129.88) 3.161,131.676 ; U31.24@4.011,130.827 3.161,131.676 ; -24.804,133.265 cw(c-23.952,133.265) -23.952,134.118 ; -24.804,133.265 cw(c-23.952,133.265) -23.952,134.118 ; -23.952,134.118 -7.186,134.118 ; -7.186,134.118 cw(c-7.186,131.578) -5.39,133.374 ; -7.186,134.118 cw(c-7.186,131.578) -5.39,133.374 ; -5.39,133.374 -5.18,133.164 ; -5.18,133.164 ccw(c-3.384,134.96) -3.384,132.42 ; -5.18,133.164 ccw(c-3.384,134.96) -3.384,132.42 ; -3.384,132.42 1.365,132.42 cw(c1.365,129.88) 3.161,131.676
  Int4 (PWR) w0.09: v1(1.68,116.738) 1.68,116.654 1.815,116.519 1.815,112.372 1.582,112.139 1.582,108.034 1.68,107.936 1.68,106.507 1.567,106.394 1.567,103.194 1.737,103.024 v1(1.737,99.739) ; v1(1.812,90.262) 1.812,91.329 1.904,91.421 1.904,92.404 1.629,92.679 1.629,94.154 1.815,94.339 1.815,95.752 v1(2.158,96.096)
  Bottom Layer w0.09: *.34@-41.409,98.243 ccw(c-41.409,99.722) -39.93,99.722 -39.93,106.011 ; v1(-24.804,132.082) -24.804,133.265 ccw(c-25.155,133.265) -25.155,133.616 -33.343,133.616 ; U24.3@1.54,90.423 1.651,90.423 v1(1.812,90.262) ; -39.93,106.011 cw(c-38.97,106.011) -39.649,106.69 ; -39.93,106.012 cw(c-38.97,106.011) -39.649,106.69 ; -39.649,106.69 ccw(c-40.623,107.665) -39.245,107.665 -39.245,110.275 ; -39.245,110.275 cw(c-38.05,110.275) -38.895,111.12 ; -39.245,110.275 cw(c-38.05,110.275) -38.895,111.12 ; -38.895,111.12 ccw(c-39.914,112.139) -38.473,112.139 ; -38.895,111.12 ccw(c-39.914,112.139) -38.473,112.139 ; -38.473,112.139 -38.473,123.519 ; -38.473,123.519 cw(c-35.933,123.519) -37.729,125.315 ; -38.473,123.519 cw(c-35.933,123.519) -37.729,125.315 ; -37.729,125.315 -36.714,126.33 ; -36.714,126.33 ccw(c-38.51,128.126) -35.97,128.126 ; -36.714,126.33 ccw(c-38.51,128.126) -35.97,128.126 ; -35.97,128.126 -35.97,130.989 ; -35.97,130.989 cw(c-33.43,130.989) -35.226,132.785 ; -35.97,130.989 cw(c-33.43,130.989) -35.226,132.785 ; -35.226,132.785 -35.139,132.872 ; -35.139,132.872 cw(c-33.343,131.076) -33.343,133.616 ; -35.139,132.872 cw(c-33.343,131.076) -33.343,133.616
D7: *.19 U16.13 U23.4 U31.25 | length 94.6
  Top Layer w0.09: v1(-31.841,134.5) -31.822,134.518 U16.13@-30.857,134.518
  Int2 (Sign) w0.09: v1(2.246,116.738) 3.73,118.222 3.73,128.006 U31.25@6.551,130.827
  Int3 (Sign) w0.09: v1(-31.841,134.5) -10.558,134.5 ; -10.558,134.499 -10.433,134.373 -10.125,134.373 -10,134.499 ; -10,134.5 -7.02,134.5 -5.968,134.5 -5.224,133.756 -4.744,133.275 ccw(c-3.178,135.275) -3.178,132.735 3.59,132.735 4.642,132.735 5.386,131.991 U31.25@6.551,130.827
  Int3 (Sign) w0.127: *.19@-43.949,116.023 -42.675,117.297 -42.675,118.8 -41.7,119.775 -41.053,119.775 -40.334,119.775 -39.826,120.283 -39.738,120.371 -39.614,120.496 -39.614,120.672 -39.614,121.114 -39.614,122.166 -38.87,122.91 -38.778,123.002 -38.115,123.665 -37.179,123.665 -36.825,123.665 -36.202,124.287 -36.202,133.868 -35.57,134.5 v1(-31.841,134.5)
  Int4 (PWR) w0.09: v1(2.052,107.381) 2.382,107.711 2.382,109.6 1.772,110.21 1.772,112.061 2.005,112.293 2.005,116.497 v1(2.246,116.738)
  Bottom Layer w0.09: U23.4@1.422,107.348 1.455,107.381 v1(2.052,107.381)
D8: *.30 U16.39 U24.5 U31.26 | length 176.1
  Top Layer w0.09: U16.39@-23.952,138.118 v1(-22.196,138.118)
  Int2 (Sign) w0.09: v1(-12.869,116.743) -12.869,121.951 v1(-9.504,125.317)
  Int3 (Sign) w0.09: v1(-22.196,138.118) -10.245,138.118 cw(c-10.245,135.578) -8.449,137.374 -4.794,133.719 ccw(c-2.998,135.515) -2.998,132.975 5.89,132.975 cw(c5.89,130.435) 7.686,132.231 U31.26@9.091,130.827 ; v1(-12.968,115.065) -12.919,115.114 -12.919,116.694 v1(-12.869,116.743) ; v1(-9.504,125.317) -9.42,125.317 -9.273,125.169 v1(5.137,125.169) ; v1(-1.453,89.27) v1(-1.453,89.27) -1.156,88.975 v1(1.027,88.975)
  Int3 (Sign) w0.127: *.30@-41.409,103.323 -42.894,104.808 -44.295,104.808 -45.499,106.011 -45.499,139.203 -44.638,140.063 -33.994,140.063 v1(-32.345,138.415)
  Int4 (PWR) w0.09: v1(-12.968,115.065) -12.486,115.065 -10.529,113.109 -10.529,108.331 -10.048,107.849 -10.048,102.587 -11.464,101.171 -11.464,98.804 -11.174,98.514 -11.027,98.366 -11.027,94.243 -10.469,93.685 -10.469,88.46 v1(-10.932,87.997) ; -9.651,125.169 v1(-9.504,125.317) ; v1(5.137,125.169) 5.539,125.169 9.091,128.722 U31.26@9.091,130.827
  Bottom Layer w0.09: v1(-10.932,87.997) -10.873,87.937 -10.873,87.835 -10.665,87.628 -6.922,87.628 -5.28,89.27 v1(-1.453,89.27) ; v1(1.027,88.975) 1.388,88.975 U24.5@1.54,88.823
  Bottom Layer w0.127: v1(-32.345,138.415) -31.237,138.415 -31.167,138.484 -29.574,138.484 -29.208,138.118 v1(-22.196,138.118)
D9: *.23 U16.15 U23.6 U31.27 | length 109.5
  Top Layer w0.09: v1(-30.025,132.404) -30.015,132.415 -30.015,132.933 -30.025,132.933 U16.15@-30.004,133.265
  Int2 (Sign) w0.09: v1(-0.06,114.145) 1.902,116.106 2.14,116.106 4.102,118.068 v1(4.102,123.527)
  Int2 (Sign) w0.127: *.23@-43.949,110.943 -43.949,112.082 -42.464,113.567 -42.464,121.449 -41.261,122.652 -40.999,122.652 -39.257,124.394 -39.257,129.42 -37.515,131.162 -31.267,131.162 v1(-30.025,132.404)
  Int3 (Sign) w0.09: v1(-30.025,132.404) -30.025,131.703 -27.315,128.993 10.849,128.993 11.631,129.775 U31.27@11.631,130.827
  Int4 (PWR) w0.09: v1(-0.329,105.351) -0.275,105.406 -0.275,109.576 -0.369,109.67 -0.369,113.835 v1(-0.06,114.145) ; v1(4.102,123.527) 4.109,123.535 4.339,123.535 U31.27@11.631,130.827
  Bottom Layer w0.09: v1(-0.329,105.351) 0.068,105.748 U23.6@1.422,105.748
D10: *.26 U16.40 U24.6 U31.28 | length 140.3
  Top Layer w0.09: U16.40@-23.952,138.518 -23.951,138.516 -23.169,138.516 -23.1,138.514 v1(-22.72,138.508)
  Int2 (Sign) w0.09: v1(6.753,115.8) 6.788,115.835 6.788,119.7 13.523,126.435 v1(14.235,126.435) ; v1(6.988,95.035) 6.928,95.095 6.928,95.352 6.895,95.386 6.895,96.722 6.85,96.767 6.85,101.458 6.995,101.603 v1(6.995,101.687)
  Int3 (Sign) w0.09: v1(-22.72,138.508) -10.14,138.508 cw(c-10.14,135.968) -8.344,137.764 -6.472,135.892 -4.599,134.019 ccw(c-2.803,135.815) -2.803,133.275 11.608,133.275 cw(c11.608,130.735) 13.404,132.531 13.508,132.427 cw(c11.907,130.827) U31.28@14.171,130.827
  Int4 (PWR) w0.09: v1(6.753,115.8) 6.753,108.906 6.692,108.845 6.692,101.99 v1(6.995,101.687) ; v1(6.988,95.035) 6.988,95.03 7.222,94.796 v1(7.222,87.29) ; U31.28@14.171,130.827 14.171,126.499 v1(14.235,126.435)
  Bottom Layer w0.09: v1(1.788,88.001) 1.987,88.001 2.385,87.603 6.909,87.603 v1(7.222,87.29)
  Bottom Layer w0.127: *.26@-41.409,108.403 ccw(c-41.409,109.62) -40.192,109.62 -40.192,111.14 cw(c-39.245,111.14) -39.915,111.81 ccw(c-40.643,112.538) -39.614,112.538 -39.614,124.175 cw(c-37.499,124.175) -38.994,125.67 -38.26,126.404 ccw(c-40.057,128.2) -37.517,128.2 -37.517,136.816 -35.528,138.805 -27.799,138.805 -27.502,138.508 v1(-22.72,138.508)
D11: *.21 U16.14 U23.5 U31.29 | length 136.4
  Top Layer w0.09: v1(-32.346,134.109) -31.968,134.118 ; U16.14@-30.857,134.118 -31.966,134.118 ; -31.968,134.118 cw(c-31.966,134.028) -31.966,134.118 ; -31.968,134.118 cw(c-31.966,134.028) -31.966,134.118
  Int2 (Sign) w0.09: v1(-32.445,126.267) -32.445,124.865 -26.285,118.706 v1(-26.285,116.866) ; v1(-32.346,134.109) -32.337,134.1 -32.337,132.394 v1(-32.328,132.385)
  Int3 (Sign) w0.09: v1(-32.445,126.267) -32.445,132.184 -32.328,132.301 v1(-32.328,132.385) -28.746,128.803 14.687,128.803 U31.29@16.711,130.827 ; v1(-26.682,111.773) -26.019,111.11 -18.828,111.11 -18.197,110.479 -5.626,110.479 -4.138,108.991 -0.999,108.991 v1(1.308,106.683)
  Int3 (Sign) w0.127: *.21@-43.949,113.483 -43.156,114.276 -42.705,114.727 -42.705,115.365 -42.705,115.921 -42.705,116.128 -41.536,117.297 -41.121,117.297 -40.192,117.297 -38.994,118.495 -38.994,118.945 -38.994,120.776 -38.994,121.429 -37.408,123.015 -37.132,123.015 -36.435,123.015 -35.535,123.915 -35.535,133.293 -34.719,134.109 v1(-32.346,134.109)
  Int4 (PWR) w0.09: v1(-26.682,111.773) -26.309,112.146 -26.309,116.842 v1(-26.285,116.866)
  Bottom Layer w0.09: v1(1.308,106.683) 1.308,106.662 U23.5@1.422,106.548